# Altium PCB 2019_TFT_Strateasy.PCBDOC
Units mil, origin at the board's own origin, x right, y up, seen from the top; angles counter-clockwise.
Board outline 3653 x 1738 mil, 4 copper layers (1-TOP, 2-SIGNAL, 3-GND, 4-BOT), stack 68 mil thick; 14 components, 30 nets, 90 pads, 3 vias.
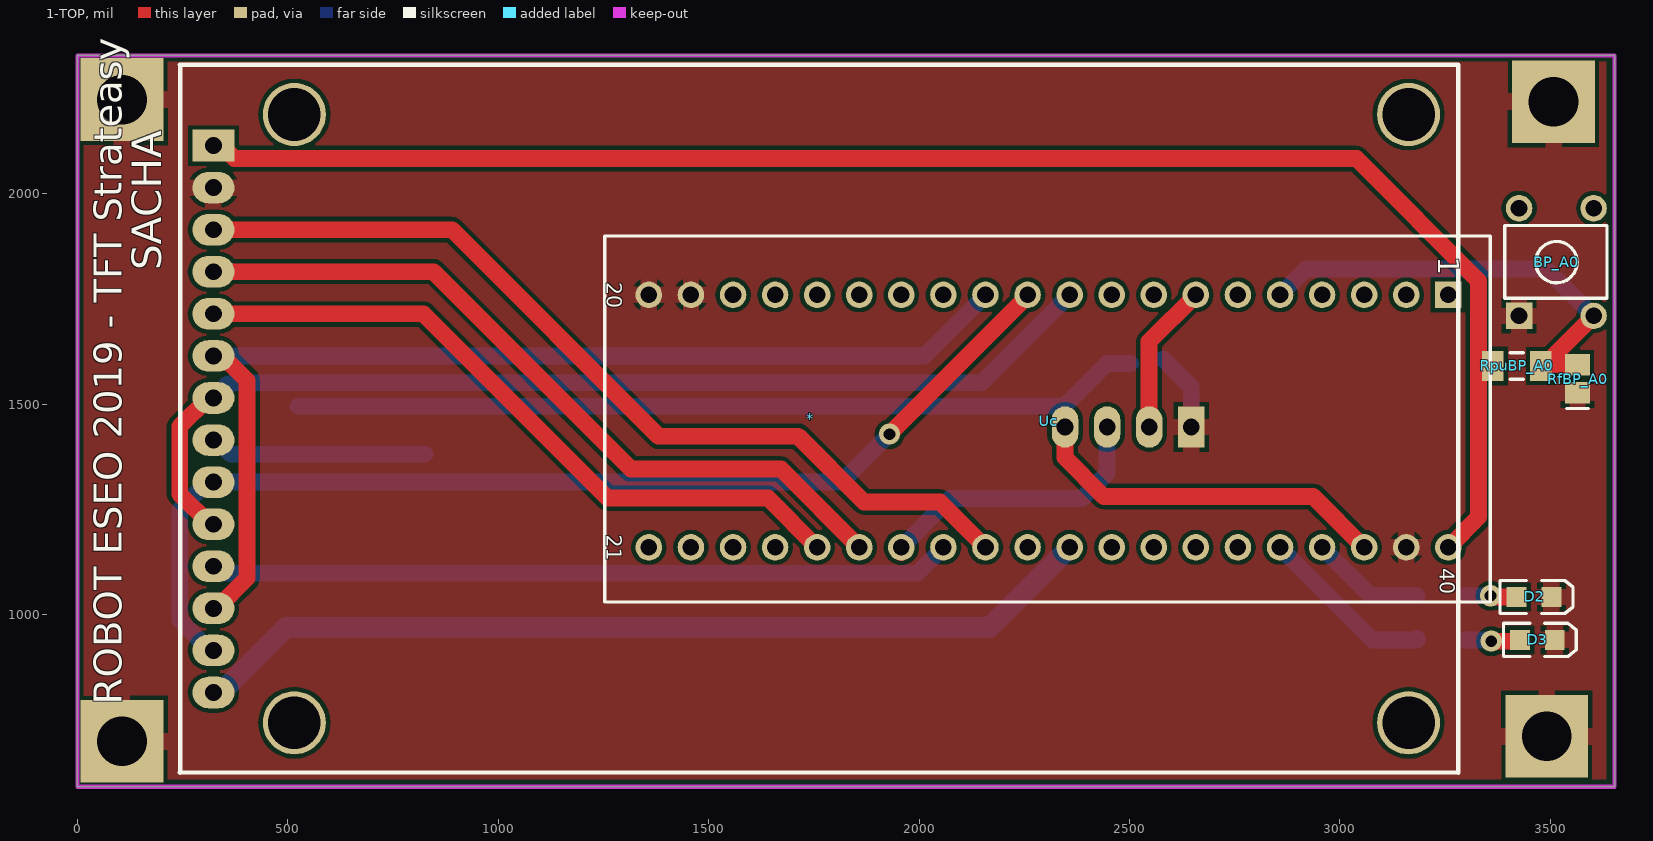
[diagram p0: 1-TOP view]
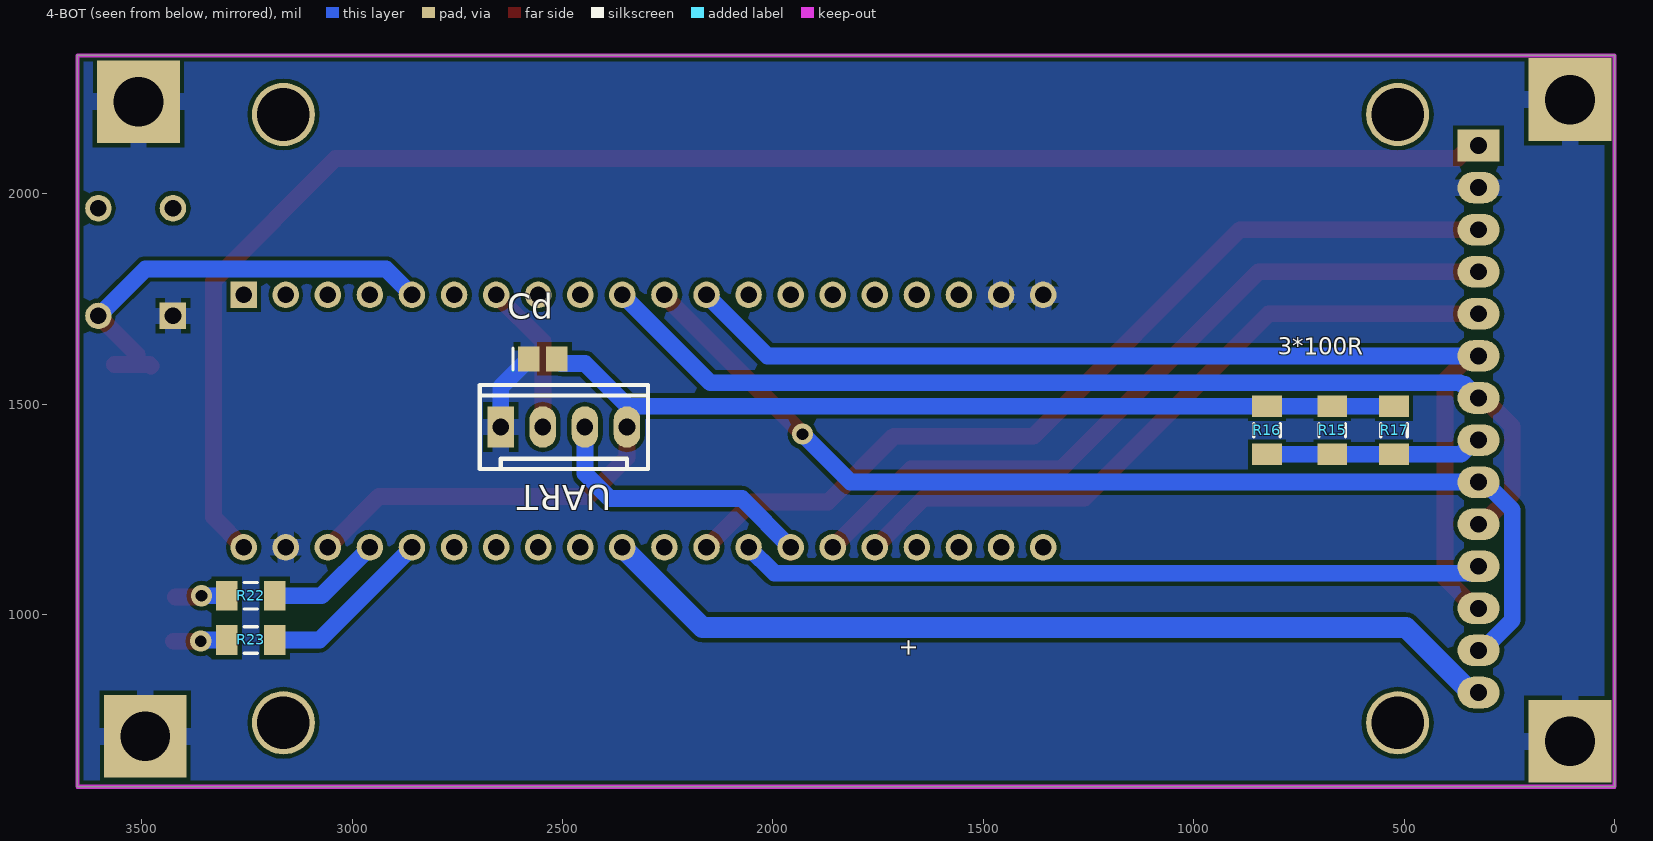
[diagram p1: 4-BOT view, seen from below]
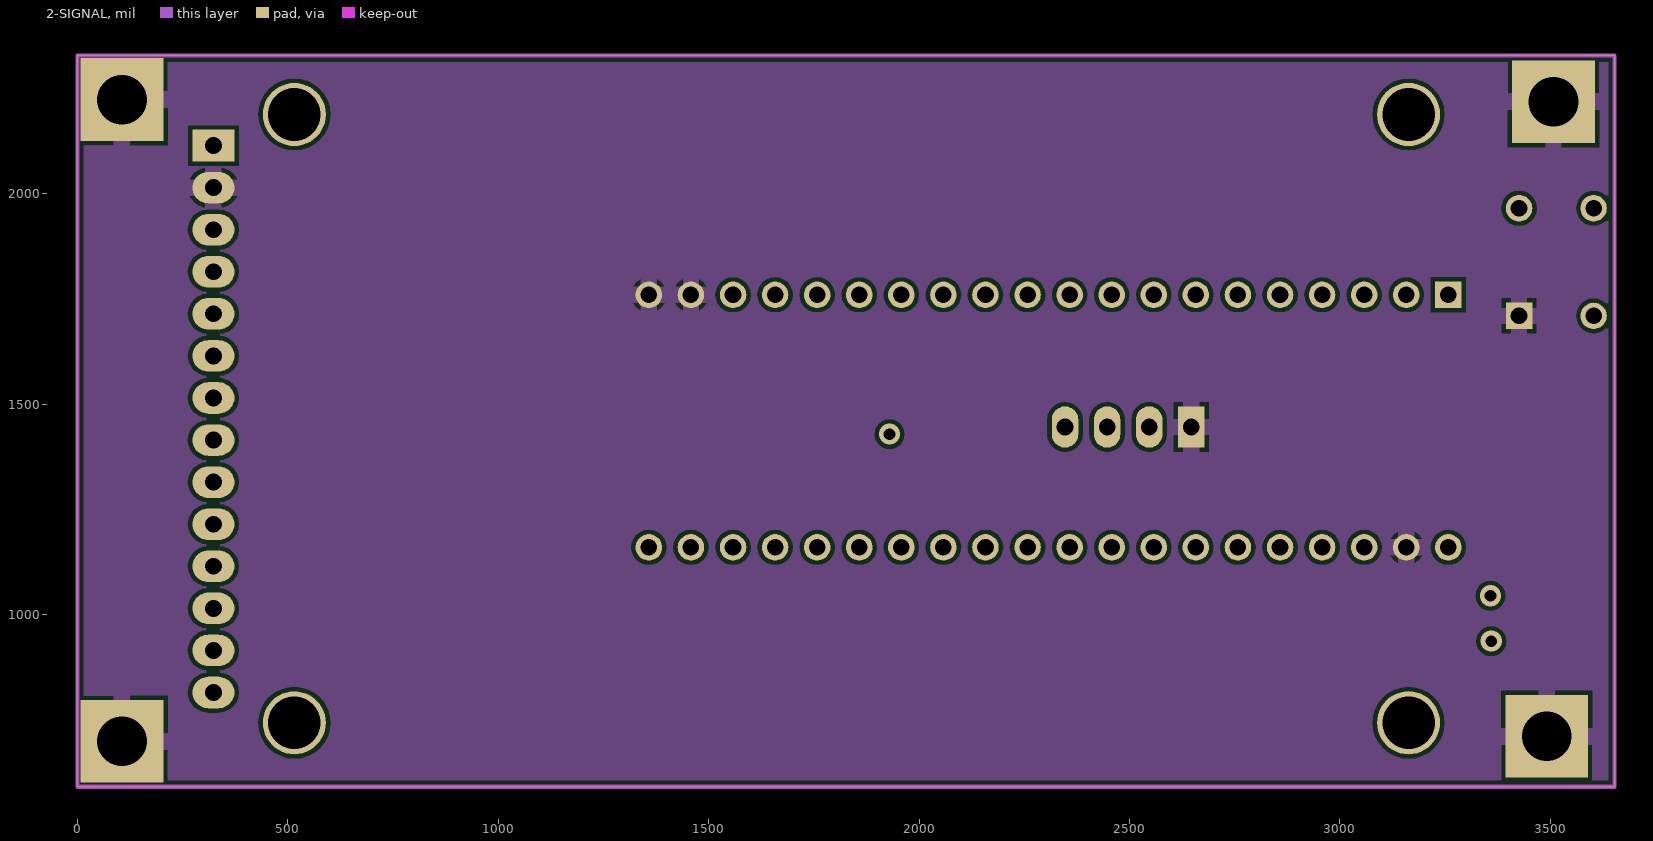
[diagram p2: 2-SIGNAL]
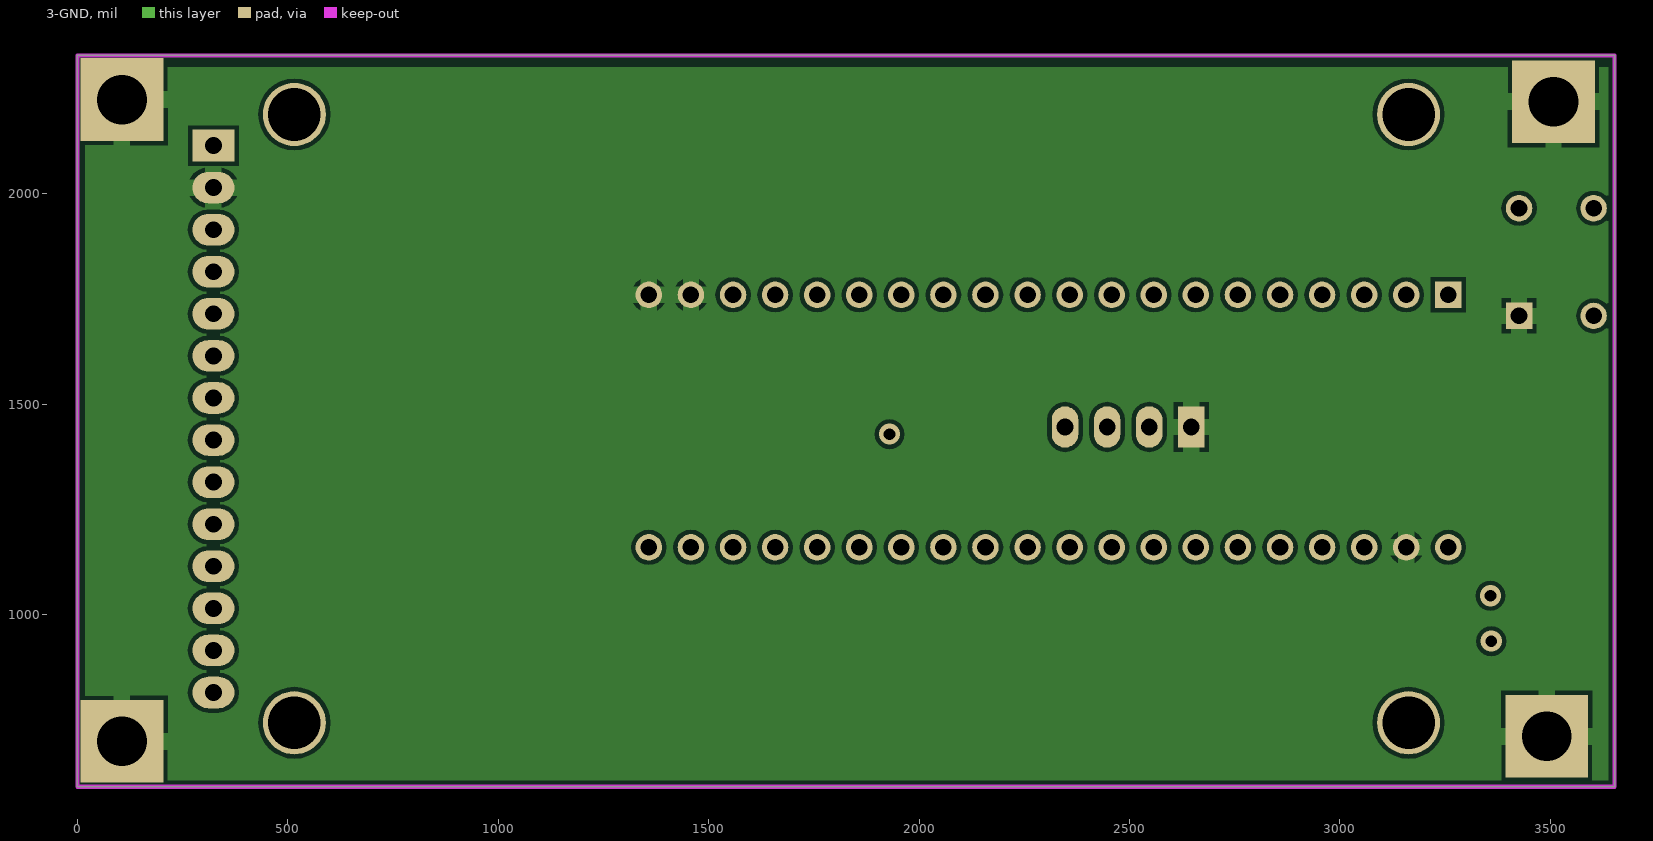
[diagram p3: 3-GND]

## Layer stack, top to bottom
Top Solder: solder mask 0.45, Solder Resist, Dk 3.5
1-TOP: signal copper 1.4
Dielectric1: core 20.8, FR-4, Dk 4.8
2-SIGNAL: signal copper 1.4
Dielectric2: prepreg 20.8, FR-4, Dk 4.8
3-GND: signal copper 1.4
Dielectric3: core 20.8, FR-4, Dk 4.8
4-BOT: signal copper 1.4
Bottom Solder: solder mask 0.45, Solder Resist, Dk 3.5

## Board outline
0,591 0,2329 3653,2329 3653,591

## Design rules (kind name [scope] priority, off if disabled: settings)
Clearance PowerPlaneClearance [InNamedPolygon('Bot-GND') Or  InNamedPolygon('Top-GND')] p1: gap=10
Clearance [All] p2: gap=10
FabricationTestPointUsage TestPointUsage [All] p1: valid=0 allowmultiple=FALSE
FabricationTestpoint Testpoint [All] p1: side=3 testpointundercomponent=TRUE minsize=40 maxsize=100 preferedsize=60 minholesize=20 maxholesize=40 preferedholesize=32 testpointgrid=1 allowsidetop=TRUE allowsidebottom=TRUE usegrid=TRUE gridtolerance=0.01
Height [All] p1: minheight=0 maxheight=2000 prefheight=500
HoleSize [All] p1: absolutevalues=TRUE maxlimit=300 minlimit=1 maxpercent=80.000 minpercent=20.000
PlaneClearance [All] p1: clearance=40
PlaneConnect [All] p1: planeconnectstyle=Relief reliefexpansion=19.68 reliefentries=4 reliefconductorwidth=40 reliefairgap=19.68
PolygonConnect [All] p1: connectstyle=Relief reliefconductorwidth=40 reliefentries=4 polygonreliefangle="90 Angle" airgapwidth=10
RoomDefinition 2019_TFT_Strateasy [InComponentClass('2019_TFT_Strateasy')] p1: confinementstyle=ConfineIn formatcopy=TRUE lockcomponents=FALSE outline -4000,-6000 -2000,-6000 -2000,-5000 -4000,-5000
RoutingVias [All] p1: holewidth=23.62 width=60 viastyle="Through Hole" minholewidth=23.62 minwidth=60 maxholewidth=23.62 maxwidth=60
SilkToSolderMaskClearance SilkscreenOverComponentPads [IsPad] p1: minsilkscreentomaskgap=10 clearancetoexposedcopper=TRUE
SolderMaskExpansion [All] p1: expansion=2
Width [All] p1: maxlimit=1000 minlimit=11 preferedwidth=40
22 further rules are at their usual default settings.

## Components (designator, comment, footprint, x,y, rotation, side; value= is the part's Value field where it differs from the comment)
* "2.4_TFT_TOUCH" 2.4_TFT_TOUCH 243,625 r0 top
BP_A0 "SW_Pushbutton_6x6mm_Vertical" "Switch 6x6 Vertical" 3426,1710 r90 top
Cd "4.7u" C0805_N 2547,1608 r180 bottom
D2 "LED" LED_0805 3461.66,1042 r0 top
D3 "LED" LED_0805 3469.66,940 r0 top
R15 "100" R1206_N 671,1438.38 r90 bottom
R16 "100" R1206_N 826,1438.38 r90 bottom
R17 "100" R1206_N 524,1438.38 r90 bottom
R22 "150" R1206_N 3240.91,1045 r180 bottom
R23 "150" R1206_N 3240.91,940 r180 bottom
RfBP_A0 "100nF" C0805_N 3565,1561 r90 top
RpuBP_A0 "100k" R1206_N 3421,1591 r0 top
UART "BARRETTE4" HE14_4 2647,1446 r180 bottom
Uc "STM32F103C8T6/PCB_DIP40" STM32F103C8T6_DIP40 3258,1760 r270 top

## Footprints (in the part's own frame and the unit in brackets; to place one, negate y for a bottom-side part, rotate by r counter-clockwise, add the part's x,y. Pads: shape width x height; smd on the part's side, far side on the other; paste and mask are expansions set on the pad)
2.4_TFT_TOUCH [mil]
  round 150 hole 125: 0(272.44,118.11) 0(272.44,1563.78) 0(2920.47,118.11) 0(2920.47,1563.78)
  rect 100x75 hole 40: 1(80,1490)
  oval 100x75 hole 40: 2(80,1390) 3(80,1290) 4(80,1190) 5(80,1090) 6(80,990) 7(80,890) 8(80,790) 9(80,690) 10(80,590) 11(80,490) 12(80,390) 13(80,290) 14(80,190)
  silkscreen extent 0,-1 3039,1682, body extent 0,-1 3039,1681, height 650
C0805_N [mm] "Chip Capacitor, Body 2.0x1.3mm, IPC Medium Density"
  rect 1.3x1.5 smd: 1(-0.85,0) 2(0.85,0)
  silkscreen extent -1.8,-0.65 -1.8,0.65, body extent -0.99,-0.63 1.01,0.63, height 0.8
HE14_4 [mm] "Connector; HE14; 4 Position; Pin Spacing=2.54mm"
  rect 1.6x2.5 hole 1: 1(0,0)
  oval 1.6x2.5 hole 1: 2(2.54,0) 3(5.08,0) 4(7.62,0)
  silkscreen extent -1.27,-2.54 8.89,2.54, body extent -1.3,-2.45 8.86,2.55, height 11.42
LED_0805 [mm] "SM LED; 2 Flat Leads"
  rect 1.2x1.2 smd: 1(-1.05,0) 2(1.05,0)
  silkscreen extent -2.05,-1 2.35,1, body extent -1.05,-0.64 1.06,0.64, height 1.2
R1206_N [mm] "Chip Resistor, Body 3.2x1.6mm, IPC Medium Density"
  rect 1.3x1.8 smd: 1(-1.45,0) 2(1.45,0)
  silkscreen extent -0.4,-0.8 0.4,0.8, body extent -1.68,-0.87 1.68,0.87, height 0.71
STM32F103C8T6_DIP40 [mm] "STM32F103 monté sur DIP40"
  rect 1.6x1.6 hole 1: 1(0,0)
  round 1.6 hole 1: 2(0,-2.54) 3(0,-5.08) 4(0,-7.62) 5(0,-10.16) 6(0,-12.7) 7(0,-15.24) 8(0,-17.78) 9(0,-20.32) 10(0,-22.86) 11(0,-25.4) 12(0,-27.94) 13(0,-30.48) 14(0,-33.02) 15(0,-35.56) 16(0,-38.1) 17(0,-40.64) 18(0,-43.18) 19(0,-45.72) 20(0,-48.26) 21(15.24,-48.26) 22(15.24,-45.72) 23(15.24,-43.18) 24(15.24,-40.64) 25(15.24,-38.1) 26(15.24,-35.56) 27(15.24,-33.02) 28(15.24,-30.48) 29(15.24,-27.94) 30(15.24,-25.4) 31(15.24,-22.86) 32(15.24,-20.32) 33(15.24,-17.78) 34(15.24,-15.24) 35(15.24,-12.7) 36(15.24,-10.16) 37(15.24,-7.62) 38(15.24,-5.08) 39(15.24,-2.54) 40(15.24,0)
  silkscreen extent -3.56,-50.92 18.54,2.54, body extent -3.63,-51.04 18.37,6.1, height 11.17
"Switch 6x6 Vertical" [mm]
  rect 1.6x1.6 hole 1: 1(0,0)
  round 1.6 hole 1: 2(6.5,0) 3(0,-4.5) 4(6.5,-4.5)
  silkscreen extent 1.07,-5.31 5.46,0.86, body extent -0.71,-5.34 7.19,0.86, height 7

## Part data
BP_A0: "Switch tactil 6mm x 6mm Vertical"
Cd RfBP_A0: library part Condensateur, "Capacitor"
D2 D3: "Typical LED"
R15 R16 R17 R22 R23 RpuBP_A0: library part Resistor, "Resistor"
UART: "Header, 4-Pin"
Uc: "MICROCONTROLEUR 32 BITS - 72MHz - 34 I/O - 64 KO : FLASH - 20KO RAM - 10 CANAUX A/D 12 BITS - DIP40 - UART, SPI, I2C, USB, CAN"

## Free pads (board coordinates)
  rect 196.85x196.85 hole 118.11: 1(106,2224) 2(106,699) 3(3492,711) 4(3508,2219)

## Via types
v1: diameter 50, hole 28, 1-TOP to 4-BOT, 3 vias

## Nets (pads, with @x,y where several pads share a name; then routed paths per layer and width w, separated by ;. In a path a pad name is that pad's centre, name@x,y a point inside that pad or via, vN(x,y) a via of type N, cw(c..) or ccw(c..) an arc to the next point about the centre after c; other vN are vias at no path point)
5V: Cd.2 R15.2 R16.2 R17.2 UART.4 Uc.38 | length 2955.7
  1-TOP w40: UART.4 2347,1373 2439,1281 2937,1281 Uc.38
  4-BOT w40: R17.2 R15.2 R16.2 2345.46,1495.46 2347,1497 ; UART.4@2347,1434 UART.4 2347,1497 ; Cd.2@2502.45,1596.91 2446.91,1596.91 2347,1497
+3V3: *.1 RpuBP_A0.1 Uc.40 | length 3822.4
  1-TOP w40: *.1 342,2115 373.22,2083.78 3039.64,2083.78 3330,1793.42 3330,1232 Uc.40
  2-SIGNAL w40: *.1 *.1@342,2115
GND: *.2 BP_A0.1 Cd.1 D2.2 D3.2 pad.1 pad.2 pad.3 pad.4 RfBP_A0.1 UART.1 Uc.19 Uc.20 Uc.39 | length 189.6
  4-BOT w40: Cd.1 2647,1541.46 UART.1
Net*_8: *.8 R15.1 R16.1 R17.1 | length 517
  4-BOT w40: *.8 330.96,1415 364.67,1381.29 R17.1 R15.1 R16.1
NetD2_1: D2.1 R22.1 | length 123.6
  1-TOP w40: v1(3358,1045) 3361,1042 D2.1
  4-BOT w40: R22.1 v1(3358,1045)
NetD3_1: D3.1 R23.1 | length 127.3
  1-TOP w40: v1(3360,937) D3.1@3425.32,937
  4-BOT w40: R23.1 v1@3360,940
PA0_Button: BP_A0.3 RfBP_A0.2 RpuBP_A0.2 Uc.5 | length 1034.7
  1-TOP w40: RpuBP_A0.2 3481.55,1594.46 RfBP_A0.2 ; 3511.58,1618.42 BP_A0.3
  4-BOT w40: Uc.5 2919.5,1821.5 3491.67,1821.5 BP_A0.3
PA1: Uc.6
PA2_RX: UART.2 Uc.7 | length 360
  1-TOP w40: UART.2 2547,1649 Uc.7
PA3_RX: Uc.8
PA3_TX: UART.3 Uc.27 | length 689.2
  1-TOP w40: Uc.27@1958,1148 Uc.27 ; UART.3@2447,1441.32 UART.3
  4-BOT w40: Uc.27 2074,1276 2388,1276 2447,1335 UART.3
PA4_Button: Uc.9
PA5_SPI-SCK: *.7 *.10 Uc.10 | length 2514.4
  1-TOP w40: *.10 315.04,1215 243,1287.04 243,1447 311,1515 *.7
  4-BOT w40: *.7 355.5,1547.5 363.46,1547.5 367.01,1551.06 2149.06,1551.06 Uc.10
PA6_SPI-MISO: *.9 *.13 Uc.11 | length 2600.2
  1-TOP w40: v1(1930,1429) 2258,1757 Uc.11
  4-BOT w40: *.13 315.04,915 243,987.04 243,1248.96 309.04,1315 *.9 1816,1315 v1(1930,1429)
PA7_SPI-MOSI: *.6 *.12 Uc.12 | length 2578.9
  1-TOP w40: *.12 330.96,1015 403,1087.04 403,1557 345,1615 *.6
  4-BOT w40: *.6 2013,1615 Uc.12
PA8_TFT-DC: *.5 Uc.25 | length 1666.9
  1-TOP w40: *.5 822,1715 1260,1277 1641,1277 Uc.25
  4-BOT w40: Uc.25 Uc.25@1758,1162
PA9_TFT-RESET: *.4 Uc.26 | length 1807.3
  1-TOP w40: *.4 846,1815 1315,1346 1672,1346 Uc.26
  4-BOT w40: Uc.26 Uc.26@1858,1161
PA11_TOUCH-CS: *.11 Uc.28 | length 1767.3
  4-BOT w40: *.11 339.5,1098.5 1996.5,1098.5 Uc.28
PA12_TFT-CS: *.3 Uc.29 | length 2147.7
  1-TOP w40: *.3 890,1915 1381,1424 1713,1424 1869,1268 2050,1268 Uc.29
PB0: Uc.13
PB1: Uc.14
PB3_TOUCH-IRQ: *.14 Uc.31 | length 2177.9
  4-BOT w50: *.14 341,815 496,970 2168,970 Uc.31
PB6: Uc.34
PB7: Uc.35
PB8: R23.2 Uc.36 | length 420.1
  4-BOT w40: Uc.36 3078,940 R23.2 R23.2@3183.83,943.17
PB9: R22.2 Uc.37 | length 273.5
  4-BOT w40: Uc.37 3073,1045 R22.2
PB10: Uc.15
PB13: Uc.22
PB14: Uc.23
PB15: Uc.24
pads on no net: *.0 BP_A0.2 BP_A0.4 Uc.1 Uc.2 Uc.3 Uc.4 Uc.16 Uc.17 Uc.18 Uc.21 Uc.30 Uc.32 Uc.33

## Polygon pours and split planes (outlines as drawn)
GND on 3-GND "3-GND" (solid, pour order 7): 18,2301 3653,2301 3653,591 18,591
GND on 2-SIGNAL "2-GND" (solid, pour order 6): 12,2313 3649,2313 3649,603 12,603
GND on 1-TOP "Top-GND" (solid, pour order 5): 12,2320 3633.78,2320 3633.78,609 12,609
GND on 4-BOT "Bot-GND" (solid, pour order 8): 24,2324 3653,2324 3653,591 24,591

## Keep-outs
KeepOutLayer:
  the board outline again, w10

## Silkscreen, mask and mechanical layers (free items; w line width, h text height)
Top Overlay:
  text "SACHA" at 223,1818 h120 r90
  text "ROBOT ESEO 2019 - TFT Strateasy" at 128,786 h115 r90
Bottom Overlay:
  text "3*100R" at 800,1618 h40
  text "+" at 1695,899 h40 r90

## Text inside footprints (layer, text, board x,y; h text height)
Uc: Top Overlay "1" at 3234.38,1850.55 h50 r270; Top Overlay "20" at 1258,1790 h35.43 r270; Top Overlay "40" at 3238,1110 h35.43 r270; Top Overlay "21" at 1258,1190 h35.43 r270